# Altium PCB updated_lloraxbee2.PcbDoc
Units mil, origin at the board's own origin, x right, y up, seen from the top; angles counter-clockwise.
Board outline 960 x 1296.85 mil, 2 copper layers (Top Layer, Bottom Layer); 30 components, 36 nets, 113 pads, 62 vias.
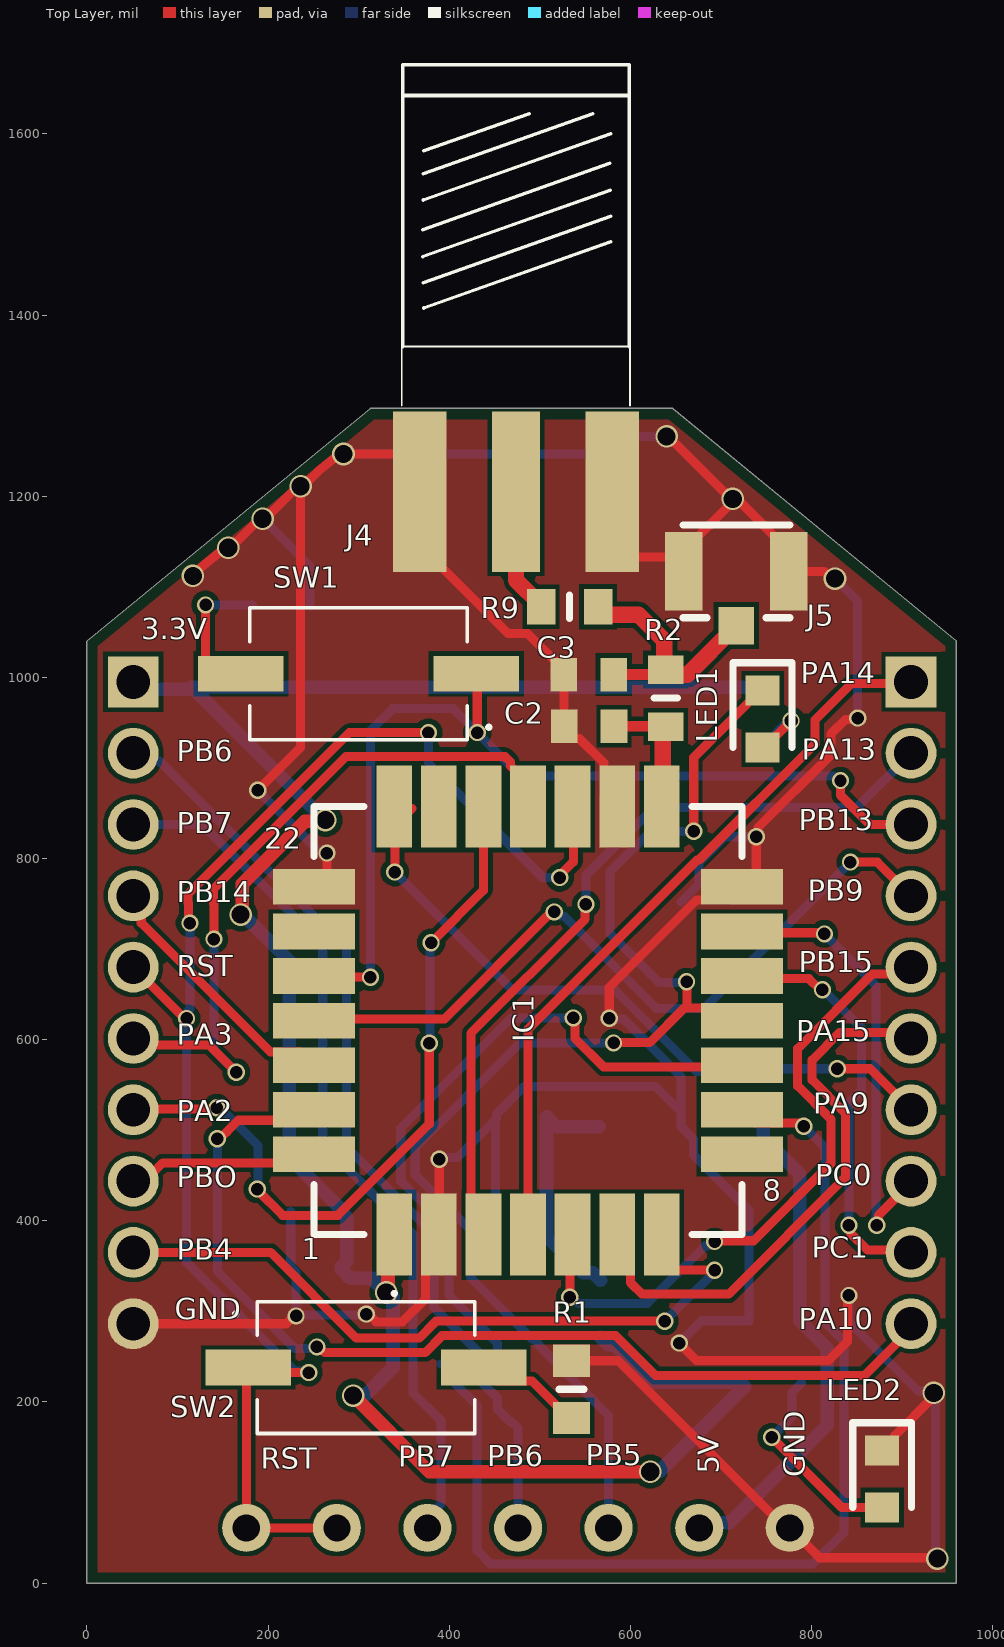
[diagram p0: Top Layer view]
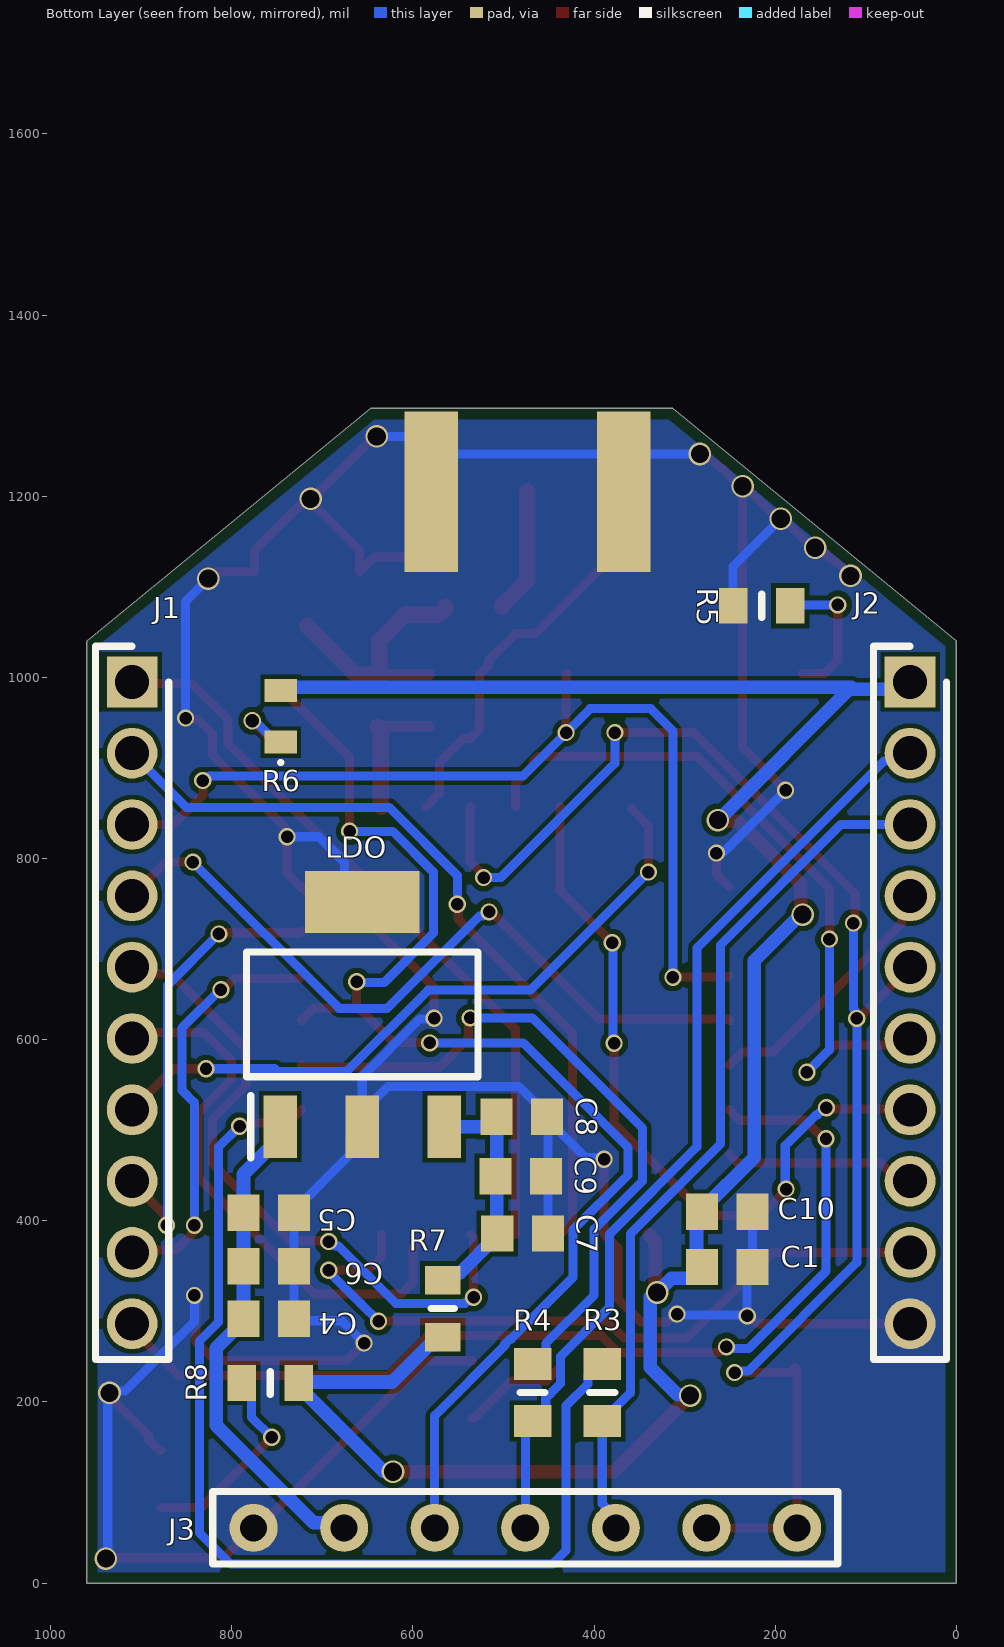
[diagram p1: Bottom Layer view, seen from below]

## Layer stack, top to bottom
Top Solder: solder mask 0.4, Solder Resist, Dk 3.5
Top Layer: signal copper 1.4
Dielectric 1: dielectric 12.6, FR-4, Dk 4.8
Bottom Layer: signal copper 1.4
Bottom Solder: solder mask 0.4, Solder Resist, Dk 3.5

## Board outline
0,0 0,1040 313.07,1296.85 646.85,1296.85 960,1040 960,0

## Design rules (kind name [scope] priority, off if disabled: settings)
BoardOutlineClearance [All] p1: gap=12 ignorepadtopadclearanceinfootprint=FALSE
Clearance [All] p1: gap=5 ignorepadtopadclearanceinfootprint=FALSE except(6: Arc-Arc Arc-Track Track-Track Via-Via Via-Fill Via-Poly Via-Region Via-Text Via-Hole; 12: Arc-Via Track-Via)
ComponentClearance [All] p1: gap=0 collisioncheckmode=3 verticalgap=0 showdistances=TRUE
PlaneConnect [All] p1: planeconnectstyle=Direct reliefexpansion=20 reliefentries=4 reliefconductorwidth=10 reliefairgap=10
PolygonConnect [All] p1: connectstyle=Direct reliefconductorwidth=10 reliefentries=4 polygonreliefangle="90 Angle" airgapwidth=10
RoutingVias [All] p1: holewidth=13.78 width=6.3 viastyle="Through Hole" minholewidth=3.94 minwidth=3.94 maxholewidth=118.11 maxwidth=50.28
SolderMaskExpansion [All] p1: expansion=4 istentingtop=FALSE
Width [All] p1: maxlimit=50 minlimit=10 preferedwidth=10
28 further rules are at their usual default settings.

## Classes and differential pairs
component class LoraXbee: C1 C2 C3 C10 IC1 J4 J5 LED1 R1 R2 R3 R4 R5 R6 R9 SW1 SW2
component class "loraxbee_ldo sheet": C4 C5 C6 C7 C8 C9 J1 J2 J3 LDO LED2 R7 R8

## Components (designator, comment, footprint, x,y, rotation, side; value= is the part's Value field where it differs from the comment)
C1 "4.7uf" CAPC1608X100N 253,349 r0 bottom
C2 "NC" CAPC1608X90N 554.44,946 r0 top
C3 "NC" CAPC1608X90N 554,1003 r0 top
C4 "47uf" CAPC1608X100N 759.15,292 r180 bottom
C5 "10uf" CAPC1608X100N 759.15,409 r180 bottom
C6 "1uf" CAPC1608X100N 759.15,350 r180 bottom
C7 "0.1uf" CAPC1608X100N 479,386 r180 bottom
C8 "47uf" CAPC1608X100N 480,515 r180 bottom
C9 "10uf" CAPC1608X100N 481,449 r180 bottom
C10 "0.1uf" CAPC1608X100N 253,410 r0 bottom
IC1 "LoRa-E5" LoRaE5 487,621 r90 top locked
J1 "2MM-HB-S10-VT-02-H-TB" HDRV10W53P0X200_1X10_1980X200X555P 910,995 r270 bottom
J2 "2MM-HB-S10-VT-02-H-TB" HDRV10W53P0X200_1X10_1980X200X555P 51.18,995 r270 bottom
J3 "7 pin 2.54mm pitch header" "2.5mm 7 pin header" 776,61 r180 bottom locked
J4 "ufl connector" SMA_EDGE_5_6.4x7.8 473.7,1205 r90 top
J5 "sma antenna" 1909763-1 717,1117 r0 top
LDO "TC1264-3.3VDB" SOT230P700X180-4N 656,627.98 r90 bottom
LED1 "FKR1111C-TR" LEDC1608X80N 746,954.05 r270 top
LED2 "FKR1111C-TR" LEDC1608X80N 878,115 r270 top
R1 "22ohm" RESC1609X55N 535,214 r270 top
R2 "0ohm" RESC1608X55N 639,977 r90 top
R3 "22 ohm" RESC1609X55N 391,210.5 r90 bottom
R4 "22ohm" RESC1609X55N 468,210.5 r90 bottom
R5 "470 ohm" RESC1608X55N 215,1079 r0 bottom
R6 "1K" ERA3AEB101V 746,957 r90 bottom
R7 "0ohm" RESC1608X55N 567,303 r90 bottom
R8 "1k" RESC1608X55N 757.57,221 r0 bottom
R9 "0ohm" RESC1608X55N 533,1078 r180 top
SW1 "PTS636_SK25F_SMTR_LFS" PTS636SK25FSMTRLFS 300,1004 r180 top
SW2 "PTS636_SK25F_SMTR_LFS" PTS636SK25FSMTRLFS 308,238 r0 top

## Footprints (in the part's own frame and the unit in brackets; to place one, negate y for a bottom-side part, rotate by r counter-clockwise, add the part's x,y. Pads: shape width x height; smd on the part's side, far side on the other; paste and mask are expansions set on the pad)
"2.5mm 7 pin header" [mm]
  round 1.35 hole 0.762: 8(0,0) 9(2.54,0) 10(5.08,0) 11(7.62,0) 12(10.16,0) 13(12.7,0) 14(15.24,0)
  silkscreen extent -1.14,-1.02 16.38,1.02
1909763-1 [mm]
  rect 1.05x2.2 smd: 1(-1.475,0) 3(1.475,0)
  rect 1x1.05 smd: 2(0,-1.525)
  silkscreen extent -1.5,-1.3 1.5,1.3, body extent -1.5,-1.83 1.5,1.27, height 1.23
CAPC1608X90N [mm]
  rect 0.75x0.94 smd: 1(-0.7,0) 2(0.7,0)
  body extent -0.8,-0.45 0.8,0.45, height 0.8
CAPC1608X100N [mm]
  rect 0.9x1.02 smd: 1(-0.71,0) 2(0.71,0)
  body extent -0.8,-0.4 0.8,0.4, height 1
ERA3AEB101V [mm]
  rect 0.65x0.9 smd: 1(-0.725,0) 2(0.725,0)
  silkscreen extent -1.35,-0.05 -1.25,0.05, body extent -0.8,-0.4 0.8,0.4, height 0.45
HDRV10W53P0X200_1X10_1980X200X555P [mm]
  rect 1.425x1.425 hole 0.95: 1(0,0)
  round 1.425 hole 0.95: 2(2,0) 3(4,0) 4(6,0) 5(8,0) 6(10,0) 7(12,0) 8(14,0) 9(16,0) 10(18,0)
  silkscreen extent -1,-1.02 19,1.02, body extent -0.9,-1 18.9,1, height 5.55
LEDC1608X80N [mm]
  rect 0.85x0.95 smd: 1(-0.8,0) 2(0.8,0)
  silkscreen extent -1.58,-0.82 0.8,0.82
LoRaE5 [mm]
  rect 2.3x1 smd: 1(-6,3.75) 2(-6,2.5) 3(-6,1.25) 4(-6,0) 5(-6,-1.25) 6(-6,-2.5) 7(-6,-3.75) 15(6,-3.75) 16(6,-2.5) 17(6,-1.25) 18(6,0) 19(6,1.25) 20(6,2.5) 21(6,3.75)
  rect 1x2.3 smd: 8(-3.75,-6) 9(-2.5,-6) 10(-1.25,-6) 11(0,-6) 12(1.25,-6) 13(2.5,-6) 14(3.75,-6) 22(3.75,6) 23(2.5,6) 24(1.25,6) 25(0,6) 26(-1.25,6) 27(-2.5,6) 28(-3.75,6)
  silkscreen extent -7.7,-6 6,6, body extent -6,-6 6,6, height 2.6
PTS636SK25FSMTRLFS [mm]
  rect 2.4x1 smd: 1(-3.3,0) 2(3.3,0)
  silkscreen extent -3.7,-1.85 3.05,1.85, body extent -4.4,-1.85 4.4,1.85, height 2.8
RESC1608X55N [mm]
  rect 0.8x1 smd: 1(-0.8,0) 2(0.8,0)
  silkscreen extent 0,-0.33 0,0.33, body extent -0.77,-0.42 0.78,0.43, height 0.45
RESC1609X55N [mm]
  rect 0.9x1.05 smd: 1(-0.8,0) 2(0.8,0)
  silkscreen extent 0,-0.35 0,0.35, body extent -0.8,-0.4 0.8,0.4, height 0.45
SMA_EDGE_5_6.4x7.8 [mm]
  rect 4.5x1.35 smd: 1(0,0)
  rect 4.5x1.5 smd: 2(0,2.7) 4(0,-2.7)
  rect 4.5x1.5 smd far side: 3(0,2.7) 5(0,-2.7)
  silkscreen extent 2.42,-3.2 11.97,3.2, body extent -1.47,-3.23 11.86,3.12, height 3.67
SOT230P700X180-4N [mm]
  rect 1.75x0.95 smd: 1(-3.15,2.3) 2(-3.15,0) 3(-3.15,-2.3)
  rect 1.75x3.2 smd: 4(3.15,0)
  silkscreen extent -4.03,-3.25 1.75,3.25, body extent -3.5,-3.25 3.5,3.25, height 1.8

## Part data
C1 C4 C5 C6 C7 C8 C9 C10: library part GCJ188C70J475KE02D, "Capacitor", Manufacturer_Name="Murata Electronics", Mouser Part Number=81-GCJ188C70J475KE2D, Arrow Part Number=GCJ188C70J475KE02D, Arrow Price/Stock=https://www.arrow.com/en/products/gcj188c70j475ke02d/murata-manufacturing?region=nac, Datasheet Link=https://psearch.en.murata.com/capacitor/product/GCJ188C70J475KE02%23.html, Height=1mm, Manufacturer_Part_Number=GCJ188C70J475KE02D, Mouser Price/Stock=https://www.mouser.co.uk/ProductDetail/Murata-Electronics/GCJ188C70J475KE02D?qs=QzBtWTOodeVfJR8CElrI4A%3D%3D
C2 C3: library part GRM188R71C104MA01D, "Capacitor", Manufacturer_Name="Murata Electronics", Mouser Part Number=81-GRM18R71C104MA01D, Arrow Part Number=GRM188R71C104MA01D, Arrow Price/Stock=https://www.arrow.com/en/products/grm188r71c104ma01d/murata-manufacturing, Datasheet Link=http://componentsearchengine.com/Datasheets/1/GRM188R71C104MA01D.pdf, Height=0.9mm, Manufacturer_Part_Number=GRM188R71C104MA01D, Mouser Price/Stock=https://www.mouser.com/Search/Refine.aspx?Keyword=81-GRM18R71C104MA01D
IC1: "Integrated Circuit", Manufacturer_Name="Seeed Studio", Datasheet Link=https://no.mouser.com/datasheet/2/744/LoRa_E5_module_datasheet_V1_0-2488126.pdf, Height=2.5mm, Manufacturer_Part_Number=LoRa-E5
J1 J2: "Connector", Manufacturer_Name="TE Connectivity", Mouser Part Number=571-2MM-HBS10VT02HTB, Datasheet Link=https://www.mouser.com/datasheet/2/418/9/ENG_DS_1_1773952_5_1915-3118174.pdf, Height=5.55mm, Manufacturer_Part_Number=2MM-HB-S10-VT-02-H-TB, Mouser Price/Stock=https://www.mouser.co.uk/ProductDetail/TE-Connectivity/2MM-HB-S10-VT-02-H-TB?qs=9vOqFld9vZW8PvcL2%252Bd%2FMA%3D%3D
J4: library part SMA_CON_4, ComponentLink1Description=http://www.amphenolrf.com/media/downloads/3672/132372-11.pdf, ComponentLink1URL=http://www.amphenolrf.com/media/downloads/3672/132372-11.pdf
J5: library part 1909763-1, "Connector", Manufacturer_Name="TE Connectivity", Mouser Part Number=571-1909763-1, Arrow Part Number=1909763-1, Arrow Price/Stock=https://www.arrow.com/en/products/1909763-1/te-connectivity?region=nac, Datasheet Link=http://www.te.com/commerce/DocumentDelivery/DDEController?Action=srchrtrv&DocNm=1909763&DocType=Customer+Drawing&DocLang=English, Manufacturer_Part_Number=1909763-1, Mouser Price/Stock=https://www.mouser.co.uk/ProductDetail/TE-Connectivity-AMP/1909763-1?qs=zR8VgEwoOb2%252BUqFkM9%2F6jQ%3D%3D
LDO: "Integrated Circuit", Manufacturer_Name=Microchip, Mouser Part Number=579-TC1264-3.3VDB, Arrow Part Number=TC1264-3.3VDB, Arrow Price/Stock=https://www.arrow.com/en/products/tc1264-3.3vdb/microchip-technology?region=nac, Datasheet Link=http://ww1.microchip.com/downloads/en/devicedoc/21375d.pdf, Height=1.8mm, Manufacturer_Part_Number=TC1264-3.3VDB, Mouser Price/Stock=https://www.mouser.co.uk/ProductDetail/Microchip-Technology/TC1264-3.3VDB?qs=AkCjCAp%252BzjQSxS5e2ugTcA%3D%3D
LED1 LED2: "LED", Manufacturer_Name="Stanley Electric", Mouser Part Number=327-FKR1111CTR, Arrow Part Number=FKR1111C-TR, Arrow Price/Stock=https://www.arrow.com/en/products/fkr1111c-tr/stanley-electric?region=nac, Datasheet Link=http://www.stanley-components.com/php/downloaddatafile.php?rp=0,FKR1111C-TR_e.pdf, Height=0.8mm, Manufacturer_Part_Number=FKR1111C-TR, Mouser Price/Stock=https://www.mouser.co.uk/ProductDetail/Stanley-Electric/FKR1111C-TR?qs=byeeYqUIh0N4LNttpqKOoA%3D%3D
R1 R3 R4: library part ERJ-P03J220V, "Resistor", Manufacturer_Name=Panasonic, Mouser Part Number=667-ERJ-P03J220V, Datasheet Link=http://industrial.panasonic.com/cdbs/www-data/pdf/RDA0000/AOA0000C102.pdf, Height=0.55mm, Manufacturer_Part_Number=ERJ-P03J220V, Mouser Price/Stock=https://www.mouser.co.uk/ProductDetail/Panasonic/ERJ-P03J220V?qs=18kBAoNi3c8s2FjgUUqr2Q%3D%3D
R2 R7 R8 R9: library part MCT0603HZ0000ZP500, "Resistor", Manufacturer_Name=Vishay, Mouser Part Number=594-MCT0603HZ0000ZP5, Arrow Part Number=MCT0603HZ0000ZP500, Arrow Price/Stock=https://www.arrow.com/en/products/mct0603hz0000zp500/vishay?region=nac, Datasheet Link=http://www.vishay.com/docs/28705/mcx0x0xpro.pdf, Height=0.55mm, Manufacturer_Part_Number=MCT0603HZ0000ZP500, Mouser Price/Stock=https://www.mouser.co.uk/ProductDetail/Vishay-Beyschlag/MCT0603HZ0000ZP500?qs=xy8ZAJ6gwchPwuxyJv%252BYaw%3D%3D
R5: library part ERJ-S03F4700V, "Resistor", Manufacturer_Name=Panasonic, Mouser Part Number=667-ERJ-S03F4700V, Datasheet Link=https://industrial.panasonic.com/cdbs/www-data/pdf/RDP0000/AOA0000C334.pdf, Height=0.55mm, Manufacturer_Part_Number=ERJ-S03F4700V, Mouser Price/Stock=https://www.mouser.co.uk/ProductDetail/Panasonic/ERJ-S03F4700V?qs=Zyl8A9hlmJo8QyiDzgvbZA%3D%3D
R6: library part ERA-3AED102V, "Resistor", Manufacturer_Name=Panasonic, Mouser Part Number=667-ERA-3AED102V, Arrow Part Number=ERA-3AED102V, Arrow Price/Stock=https://www.arrow.com/en/products/era3aed102v/panasonic?region=nac, Datasheet Link=https://industrial.panasonic.com/cdbs/www-data/pdf/RDM0000/AOA0000C307.pdf, Height=0.55mm, Manufacturer_Part_Number=ERA-3AED102V, Mouser Price/Stock=https://www.mouser.co.uk/ProductDetail/Panasonic/ERA-3AED102V?qs=yocZuyCaXdNrh6oeFjCchg%3D%3D
SW1 SW2: library part SW1_PTS636_SK25F_SMTR_LFS-SMT, "Switch", Arrow Part Number="PTS636 SK25F SMTR LFS", Manufacturer_Name="C & K COMPONENTS", Mouser Part Number=611-PTS636SK25FSMTRL, Arrow Price/Stock=https://www.arrow.com/en/products/pts636-sk25f-smtr-lfs/ck, Datasheet Link=https://www.mouser.com/datasheet/2/60/pts636-1550567.pdf, Height=2.7mm, Manufacturer_Part_Number="PTS636 SK25F SMTR LFS", Mouser Price/Stock=https://www.mouser.co.uk/ProductDetail/CK/PTS636-SK25F-SMTR-LFS?qs=vLWxofP3U2zO9PvdsA2GhQ%3D%3D

## Via types
v1: diameter 19, hole 13.78, Top Layer to Bottom Layer, 46 vias
v2: diameter 25, hole 20, Top Layer to Bottom Layer, 15 vias
v3: diameter 19, hole 14.96, Top Layer to Bottom Layer, 1 vias

## Nets (pads, with @x,y where several pads share a name; then routed paths per layer and width w, separated by ;. In a path a pad name is that pad's centre, name@x,y a point inside that pad or via, vN(x,y) a via of type N, cw(c..) or ccw(c..) an arc to the next point about the centre after c; other vN are vias at no path point)
3.3V: C1.2 C10.2 IC1.1 J2.1 R6.2 R7.1 R8.1 | length 2469.1
  Top Layer w15: v2(169.78,738) 171.69,739.91 171.69,772.19 240.74,841.23 262.23,841.23 v2(263.35,842.35) ; v2(294,207) 378,123 v2(622,123) ; v2(330.5,320.79) 332.41,322.71 332.41,377.83 IC1.1
  Bottom Layer w15: J2.1 59.18,987 118,987 ; v2(169.78,738) 172.48,738 223.3,687.19 223.3,470.02 280.95,412.36 C10.2 287,403.95 287,355.05 C1.2 280.95,346.64 291.17,336.42 314.87,336.42 333.29,318 336,318 337.91,316.09 337.91,311.1 338,311.01 338,238 307.77,207.77 294.77,207.77 v2(294,207) ; v2(263.35,842.35) 262.65,842.35 116,989 742.54,989 R6.2 ; R7.1 575.25,263.26 581.74,263.26 623,222 721.14,222 726.08,217.06 715.05,206.03 632.78,123.77 622.77,123.77 v2(622,123)
GND: C1.1 C2.1 C3.1 C4.2 C5.2 C6.2 C7.2 C8.2 C9.2 C10.1 IC1.2 IC1.14 IC1.16 IC1.22 J2.10 J3.8 J4.2 J4.3 J4.4 J4.5 J5.1 J5.3 LDO.2 LDO.4 LED2.1 R1.1 R5.2 | length 5829
  Top Layer w10: J2.10 219.9,286.34 228.56,295 v1(231,295) ; v2(117.01,1112.09) 117.01,1113.52 119.4,1115.9 119.74,1116.25 152.45,1143.09 159.01,1143.09 191.01,1175.09 v2(194.01,1175.09) 197.05,1175.09 232.96,1211 v2(236,1211) ; v1(188.61,875.38) 236,922.76 v2(236,1211) ; IC1.22 265,782.86 v1(265,806) ; v1(308.48,297) 310.91,297 319.41,288.5 348.22,288.5 373.89,314.17 373.89,370.09 IC1.2 389,385.2 v1(389,468) ; R1.1 586.5,245.5 771,61 J3.8 ; v1(576.71,623.71) 576.71,657.71 672.95,753.95 708.54,753.95 IC1.14 724.31,768.64 739,783.32 v1@739,819 ; J4.4 580,1157.2 604.53,1132.67 643.26,1132.67 J5.1 658.93,1139.64 713,1193.71 v2(713,1197) ; IC1.16 570.74,871.91 570.74,905.56 543.8,932.5 536.65,932.5 526.88,942.26 C2.1 526.66,946.22 526.66,1002.78 516.68,1012.76 516.68,1018.32 486.69,1048.31 465.03,1048.31 367.4,1145.94 J4.2 367.4,1222.12 342.87,1246.65 v2(283.24,1246.65) 278.68,1246.65 256.22,1228.22 239,1211 v2(236,1211) ; v2(640,1266) 642,1266 711,1197 v2(713,1197) ; v1(654,265) 673,246 819,246 839.6,266.6 839.6,315.96 v1(841.32,317.68) ; v1@739,820 v1(739,824) 740.72,825.72 740.72,833.72 821.5,914.5 821.5,937.5 837.68,953.68 849.68,953.68 v1(851,955) ; J3.8@773.5,63.5 809,28 938,28 v2(939,27) ; v2(826,1109) 821.94,1109 813.94,1117 J5.3 775.07,1139.64 720.58,1194.13 715.87,1194.13 v2(713,1197) ; LED2.1 879.97,146.5 891.7,158.23 891.7,162.7 935,206 v2(935,210)
  Bottom Layer w10: v1(188.61,875.38) 256.27,807.72 263.28,807.72 v1(265,806) ; v2(194.01,1175.09) 246.5,1122.6 R5.2 ; C10.1 C1.1 231,343.05 v1(231,295) 232,296 307.48,296 v1(308.48,297) ; v2(283.24,1246.65) 555.47,1246.65 J4.5@580,1222.12 ; v1(389,468) 390.72,469.72 409.13,469.72 C8.2@451.05,511.64 ; C7.2 C8.2@451.05,511.64 ; v1(576.71,623.71) 577.59,622.83 592.44,622.83 656,559.27 LDO.2@656,519.72 ; J4.5 J4.5@580,1222.12 ; v2(640,1266) 604.53,1266 580,1241.47 J4.5@580,1222.12 ; v1(654,265) 678.64,289.64 731.2,289.64 C6.2 C5.2 731.2,411.36 669.7,472.86 669.7,490.27 LDO.2 LDO.2@656,519.72 ; LDO.4 675.59,771.59 675.59,795.59 704,824 v1(739,824) ; v2(826,1109) 851,1084 v1(851,955) ; v1(841.32,317.68) 841.32,288.68 918.05,211.95 933.05,211.95 937,208 937,29 v2(939,27) ; C8.2@451.05,511.64 452.05,512.64 C8.2 452.05,517.36 483.1,548.42 627.3,548.42 LDO.2@656,519.72
  other v2: 156.01,1143.09
NetC2_2: C2.2 IC1.15 R2.1 | length 145.3
  Top Layer w12: C2.2 631.78,946 R2.1@635.64,942.14
  Top Layer w18: IC1.15 634.64,859.22 635.64,860.22 635.64,942.14 R2.1
NetC3_2: C3.2 J5.2 R2.2 R9.1 | length 288.1
  Top Layer w12: C3.2 R2.2@633.5,1003
  Top Layer w18: R9.1 564.5,1075.69 571.24,1068.94 609.06,1068.94 637.3,1040.7 637.3,1010.2 R2.2 633.5,1003 663.04,1003 J5.2
NetC7_1: C7.1 C8.1 C9.1 LDO.3 R7.2 | length 274.7
  Bottom Layer w15: LDO.3 518.17,503.97 507.95,514.19 C8.1 507.45,514.5 507.45,386.5 C7.1 506.95,383.64 547.85,342.74 558.75,342.74 R7.2
NetIC1_9: IC1.9 R3.2 | length 1192.5
  Top Layer w10: IC1.9 737.91,507.89 785.67,507.89 789.06,504.5 v1(791.5,504.5)
  Bottom Layer w10: R3.2 393.95,241.99 406.67,229.28 406.67,220.33 430.91,196.09 430.91,36.09 446,21 801,21 835.82,55.82 835.82,267.08 814.82,288.08 814.82,481.18 v1(791.5,504.5)
NetIC1_10: IC1.10 R4.2 | length 774.1
  Top Layer w10: v1(537,624) 538.72,622.28 538.72,601.59 570.49,569.83 721.26,569.83 IC1.10
  Bottom Layer w10: R4.2 466.05,241.99 453.33,254.71 453.33,264.67 400,318 400,390.67 346.5,444.17 346.5,501.98 468.52,624 v1(537,624)
NetJ4_1: J4.1 R9.2 | length 138.5
  Top Layer w18: J4.1 473.7,1107.3 501,1080 501,1078.5 R9.2
NetJ5_2: 
NetLED1_2: LED1.2 R6.1 | length 85
  Top Layer w10: LED1.2 747.97,922.55 v3(777.5,952.08)
  Bottom Layer w10: R6.1 750.92,928.46 772.83,950.36 775.78,950.36 v3(777.5,952.08)
NetLED2_2: LED2.2 R8.2 | length 227.8
  Top Layer w10: v1(756,161) 833.5,83.5 LED2.2
  Bottom Layer w10: v1(756,161) 778.32,183.32 778.32,210.25 R8.2
NetR1_2: R1.2 SW2.2 | length 120.1
  Top Layer w10: SW2.2 452.61,223.31 491.24,223.31 532.05,182.5 R1.2
NetR5_1: R5.1 SW1.2 | length 159.4
  Top Layer w10: v1(131,1080) 131,1018.69 145.69,1004 SW1.2
  Bottom Layer w10: v1(131,1080) 182.5,1080 R5.1
PA0: IC1.23
PA2: IC1.19 J2.7 | length 823.8
  Top Layer w10: J2.7 52.27,523.65 142.41,523.65 v1(143.5,524.74) ; v1(188,435) 188,434 216,406 277,406 378,507 v1(378,596) ; v1(380,707) 437.79,764.79 IC1.19
  Bottom Layer w10: v1(143.5,524.74) 145.94,524.74 153.67,517 154.98,517 189,482.98 189,436 v1(188,435) ; v1(378,596) 379,597 379,706 v1(380,707)
PA3: IC1.18 J2.6 | length 790.1
  Top Layer w10: J2.6 58.48,594 135,594 v1(165,564) ; v1(140.24,711) 140.24,715.12 140.28,715.16 140.28,750.16 140,750.44 140,766.66 285.84,912.5 461.61,912.5 467.47,906.64 467.47,902.34 487,882.81 IC1.18
  Bottom Layer w10: v1(140.24,711) 140.24,588.76 v1(165,564)
PA9: IC1.21 J1.7 | length 758.9
  Top Layer w10: v1(340,785) 340,836.11 IC1.21@358.89,855 ; v1(828.5,567.86) 864.7,567.86 J1.7
  Bottom Layer w10: v1(340,785) 470.37,654.63 583.26,654.63 672.9,565 749.73,565 752.59,567.86 v1(828.5,567.86)
PA10: IC1.27 J1.10 | length 1123.8
  Top Layer w10: v1(144,490.5) 146.44,490.5 154.17,498.24 154.48,498.24 167.24,511 239.2,511 IC1.27 ; v1(254,260.8) 256.44,260.8 262.74,254.5 373.35,254.5 392.06,273.21 583.79,273.21 628,229 858,229 910,281 J1.10
  Bottom Layer w10: v1(144,490.5) 144,344.52 229.52,259 245.83,259 245.91,259.08 252.28,259.08 v1(254,260.8)
PA13: IC1.3 J1.2 | length 869.7
  Top Layer w10: IC1.3 424,398.57 424,607 550,733 550,748.48 v1(551,749.48)
  Bottom Layer w10: v1(551,749.48) 551,781.21 626.29,856.5 850.24,856.5 J1.2
PA14: IC1.4 J1.1 | length 824.1
  Top Layer w10: IC1.4 487,611.52 673.8,798.32 675.8,798.32 804,926.52 804,953 844,993 908,993 J1.1
PA15: IC1.6 J1.6 | length 624.7
  Top Layer w10: IC1.6 600.11,370.09 600.11,331.89 613,319 708.48,319 837.5,448.02 837.5,518.6 800.58,555.53 800.58,577.42 831.16,608 903.3,608 J1.6
PB0: IC1.28 J2.8 | length 211.8
  Top Layer w10: J2.8 63.66,443.82 83.84,464 241.42,464 IC1.28
PB3: IC1.8
PB4: IC1.7 J2.9 | length 802.2
  Top Layer w10: J2.9 202.92,365.08 297.5,270.5 366.72,270.5 385.44,289.21 637.79,289.21 v1(638,289) ; IC1.7 634.64,360.19 649.32,345.5 v1(693,345.5)
  Bottom Layer w10: v1(638,289) 657.48,308.48 693,344 v1(693,345.5)
PB5: IC1.11 J3.10 LED1.1 | length 1442.1
  Top Layer w10: v1(581.46,596.33) 581.75,596.62 621.38,596.62 659.76,635 709.22,635 IC1.11 ; v1(662,664) 662.31,663.69 662.31,635.69 ; v1(670,830) 670,911.51 744.03,985.54 LED1.1
  Bottom Layer w10: J3.10 576,185 498.67,262.33 498.67,263.85 492.81,269.71 491.29,269.71 423.33,337.67 423.33,389.96 362.5,450.79 362.5,480.5 478.33,596.33 v1(581.46,596.33) ; v1(662,664) 661,663 632,663 577.5,717.5 577.5,785.08 622.42,830 v1(670,830)
PB6: J2.2 J3.11 R4.1 | length 1044.2
  Bottom Layer w10: J2.2 60,907.44 80.19,907.44 286.5,701.13 286.5,481.54 383,385.04 383,304.36 437.33,250.03 437.33,220.13 448.34,209.12 448.34,209 453.37,203.97 453.37,191.72 466.09,179 R4.1 476,171 J3.11
PB7: J2.3 J3.12 R3.1 | length 968.2
  Bottom Layer w10: J2.3 127.48,837.52 260.39,704.61 260.39,485.02 360,385.41 360,210 R3.1 391,87.68 376,72.68 J3.12
PB9: IC1.25 J1.4 | length 835.4
  Top Layer w10: IC1.25 252.78,623 395,623 508.5,736.5 509.06,736.5 513.56,741 v1(516,741) ; v1(843,796) 872.78,796 J1.4
  Bottom Layer w10: v1(516,741) 518.44,741 522.76,736.68 526.32,736.68 628.5,634.5 681.5,634.5 v1(843,796)
PB10: IC1.20
PB13: IC1.24 J1.3 SW1.1 | length 1069.7
  Top Layer w10: IC1.24 251.99,669 v1(313,669) ; SW1.1 431,1002.92 v1(431,939) ; v1(832,886) 832,870 864.48,837.52 J1.3
  Bottom Layer w10: v1(313,669) 313,941 337.5,965.5 404.5,965.5 v1(431,939) 479,891 824.56,891 829.56,886 v1(832,886)
PB14: IC1.26 J2.4 | length 289.3
  Top Layer w10: J2.4 60,749.96 60,729 202.53,586.47 236.09,586.47 IC1.26
PB15: IC1.5 J1.5 | length 730.3
  Top Layer w10: v1(533.14,315.71) 533.14,381.7 IC1.5 ; v1(693,377) 694,378 736,378 821.5,463.5 821.5,511.98 784.58,548.9 784.58,590.1 866.95,672.47 902.43,672.47 J1.5
  Bottom Layer w10: v1(533.14,315.71) 535.57,315.71 542.54,308.75 618.77,308.75 682.02,372 685.56,372 690.56,377 v1(693,377)
PC0: IC1.13 J1.8 | length 502.4
  Top Layer w10: IC1.13 724.65,718 813,718 v1(814.24,716.76) ; v1(872,395) 873.72,396.72 873.72,405.88 910,442.16 J1.8
  Bottom Layer w10: v1(814.24,716.76) 871,660 871,396 v1(872,395)
PC1: IC1.12 J1.9 | length 464.2
  Top Layer w10: IC1.12 726.04,667.39 797.18,667.39 809.56,655 v1(812,655) ; v1(841.32,395) 843.04,393.28 843.04,386.48 861.95,367.57 907.5,367.57 J1.9
  Bottom Layer w10: v1(812,655) 813,655 855,613 855,544 841.32,530.32 v1(841.32,395)
RST: IC1.17 J2.5 J3.13 J3.14 SW2.1 | length 1678.5
  Top Layer w10: J2.5 107.72,623.5 v1(110,623.5) ; v1(113.74,728.74) 112.02,730.46 112.02,750.71 111.72,751.01 111.72,761.01 289.71,939 v1(377,939) ; v1(245,232.5) 183.58,232.5 SW2.1 176,235.92 J3.14 J3.13 ; v1(522,779) 522,781.44 537,796.44 537,856.43 IC1.17
  Bottom Layer w10: v1@110,623 110,354 230,234 243.5,234 v1(245,232.5) ; v1(110,623.5) 111.72,625.22 111.72,631.59 113.74,633.6 v1(113.74,728.74) ; v1(377,939) 377,905 503,779 v1(522,779)
VCC: C4.1 C5.1 C6.1 J3.9 LDO.1 | length 549.5
  Bottom Layer w15: J3.9 681.7,66.7 709.7,66.7 817.32,174.32 817.32,259.42 787.1,289.64 C4.1 C6.1 C5.1 787.1,451.58 761.66,477.02 757.75,477.02 746.55,488.22 LDO.1

## Polygon pours and split planes (outlines as drawn)
GND on Top Layer "GND_L01_P000" (solid, pour order 0): 0,0 0,1040 313.07,1296.85 646.85,1296.85 960,1040 960,0
GND on Bottom Layer "GND_L02_P001" (solid, pour order 1): 0,0 0,1040 313.07,1296.85 646.85,1296.85 960,1040 960,0

## Silkscreen, mask and mechanical layers (free items; w line width, h text height)
Top Overlay:
  text "3.3V" at 60,1034.48 h40
  text "PA14" at 788,986 h40
  text "PA13" at 789,901.48 h40
  text "PB6" at 99,899.48 h40
  text "PB13" at 786,823.48 h40
  text "PB7" at 99,820 h40
  text "22" at 196,803 h40
  text "PB9" at 796,745.48 h40
  text "PB14" at 99,744 h40
  text "PB15" at 786,666.48 h40
  text "RST" at 99,662.48 h40
  text "PA15" at 783,590.48 h40
  text "PA3" at 99,586.48 h40
  text "PA9" at 802,510.48 h40
  text "PA2" at 99,502 h40
  text "PC0" at 804,431.48 h40
  text "PBO" at 99,429.48 h40
  text "8" at 746,414.48 h40
  text "PC1" at 800,351.44 h40
  text "1" at 237,350 h40
  text "PB4" at 99,349 h40
  text "GND" at 97,283.48 h40
  text "PA10" at 786,272.48 h40
  text "PB5" at 551,122.48 h40
  text "PB7" at 344,121 h40
  text "PB6" at 442,121.48 h40
  text "5V" at 705.52,121 h40 r90
  text "RST" at 192,118.48 h40
  text "GND" at 800.52,117 h40 r90
Mechanical 1:
  lines w7.87: 0,0 960,0 960,1040 703.15,1296.85 646.7,1296.85 310.85,1296.85 255.85,1296.85 0,1041 0,1

## Dimensions
960.2,1044.21 to 960,0 on Mechanical 1
646.85,1296.85 to 960,1296.85 on Mechanical 1
0,1040 to 960.2,1044.21 on Mechanical 1
313.07,1296.85 to 646.85,1296.85 on Mechanical 1
0,1296.85 to 313.07,1296.85 on Mechanical 1